# EAGLE board 6. prototipus - THT - Egyoldalas - FT232RL (EAGLE 7.2.0)
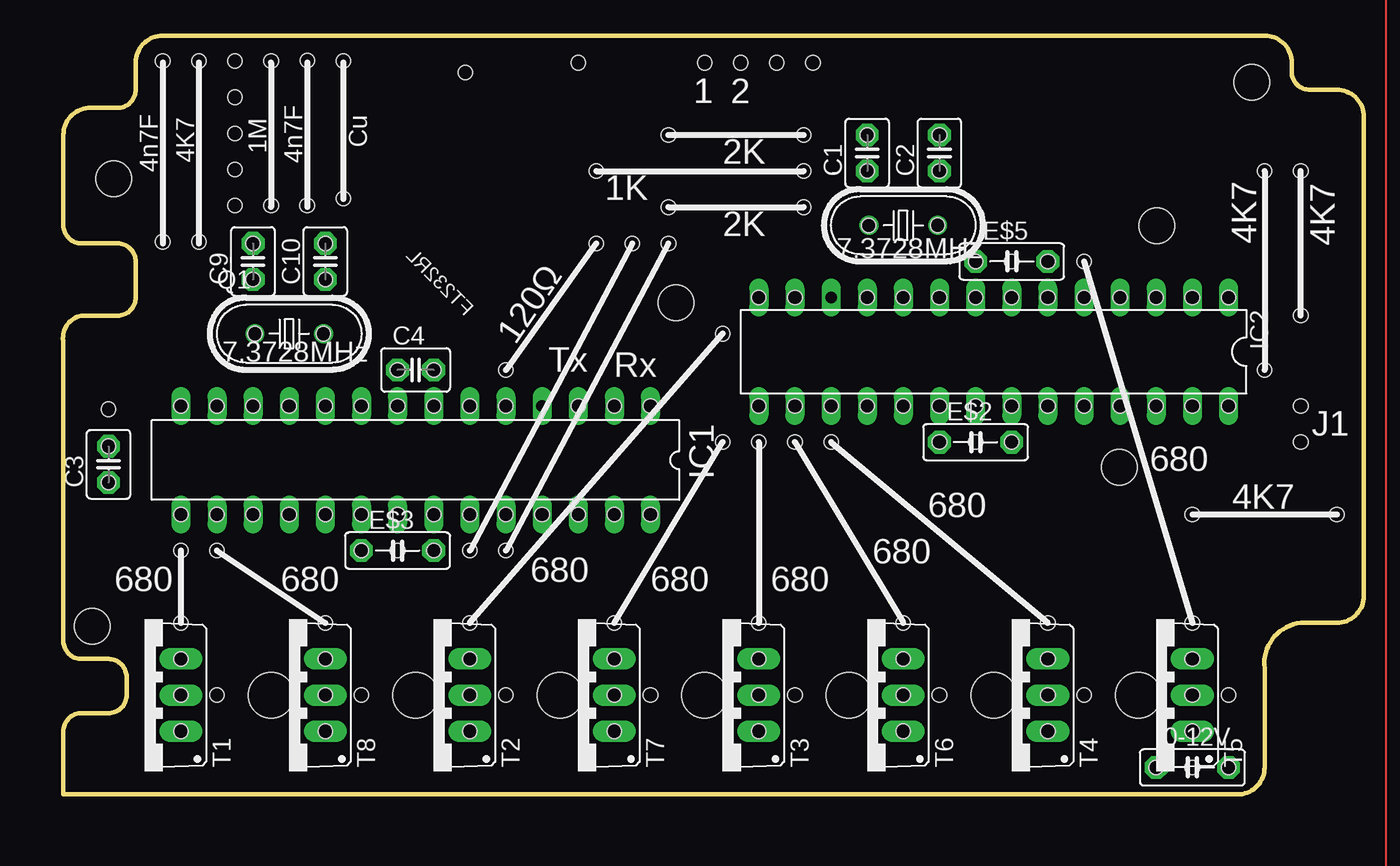
[diagram p0: board, top side]
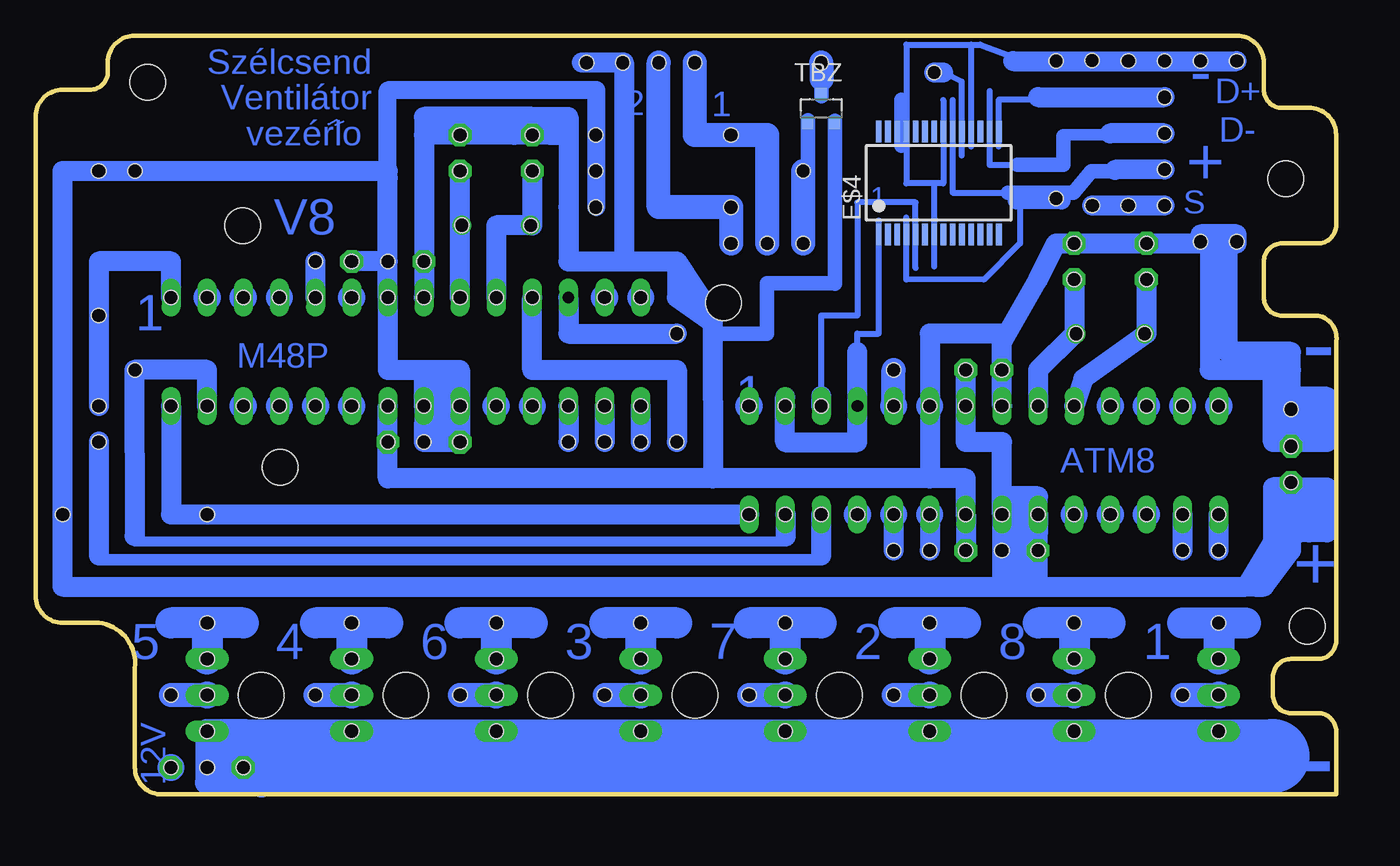
[diagram p1: board, bottom side, seen from below]

Size 91.47 x 53.34 mm. Coordinates in mm from the lower left corner, seen from the top.
Outline: 0.03,0 0.03,4.45 arc-90 1.3,5.71 3.21,5.71 arc90 4.48,6.98 4.48,8.25 arc90 3.21,9.53 1.3,9.53 arc-90 0.03,10.79 0.03,31.75 arc-90 1.3,33.66 3.84,33.66 arc90 5.11,34.92 5.11,37.46 arc90 3.84,38.73 1.3,38.73 arc-90 0.03,40.01 0.03,46.35 arc-90 1.94,48.26 3.84,48.26 arc90 5.11,49.53 5.11,51.44 arc-90 7.02,53.34 84.49,53.34 arc-90 86.39,51.44 86.39,50.8 arc90 87.66,49.53 89.57,49.53 arc-90 91.47,47.62 91.47,13.97 arc-90 89.57,12.07 87.03,12.07 arc90 84.49,8.89 84.49,1.9 arc-90 82.58,0 0.03,0
Copper layers (1*16): Top 0.035mm / dielectric 1.5mm / Bottom 0.035mm
Design rules "default": minimum track width 10mil, minimum drill 24mil, track to track 8mil, track to pad 8mil, pad to pad 8mil, via to via 8mil, smd to smd 8mil, copper to edge 40mil, drill to drill 8mil, minimum pad ring 10mil, minimum via ring 8mil, stop-mask expansion 4mil, vias tented up to drill 0mil, thermal gap 10mil
Holes 1 mm at 79.41,19.68 84.49,29.84 71.79,37.46 79.41,12.07 69.25,12.07 59.09,12.07 48.93,12.07 38.77,12.07 28.61,12.07 18.45,12.07 8.29,12.07 10.83,17.14 8.29,17.14 48.93,24.77 51.47,24.77 54.01,24.77 46.39,32.38 46.39,24.77 89.57,19.68 19.71,51.55 19.72,41.89 12.09,51.55 12.09,49.01 12.09,46.47 12.09,43.93 12.09,41.39 14.63,41.39 17.17,41.39 14.63,51.55 17.19,51.58 13.37,38.73 13.37,36.2 18.45,36.2 18.45,38.73 18.32,32.38 13.49,32.38 18.45,27.3 20.99,27.3 56.55,43.81 56.55,46.35 61.63,46.35 61.63,43.81 61.5,40.01 56.66,39.99 59.09,34.92 61.63,34.92 64.17,34.92 23.53,27.3 26.07,27.3 8.29,27.3 10.83,27.3 13.37,27.3 15.91,27.3 28.61,27.3 31.15,27.3 36.23,27.3 38.77,27.3 41.31,27.3 41.31,19.68 38.77,19.68 36.23,19.68 33.69,19.68 31.15,19.68 28.61,19.68 26.07,19.68 23.53,19.68 20.99,19.68 18.45,19.68 15.91,19.68 13.37,19.68 10.83,19.68 8.29,19.68 48.93,27.3 51.47,27.3 54.01,27.3 56.55,27.3 59.09,27.3 61.63,27.3 64.17,27.3 66.71,27.3 69.25,27.3 71.79,27.3 74.33,27.3 76.87,27.3 79.41,27.3 81.95,27.3 81.95,34.92 79.41,34.92 76.87,34.92 74.33,34.92 71.79,34.92 69.25,34.92 66.71,34.92 56.55,34.92 51.47,34.92 48.93,34.92 8.29,9.53 8.29,6.98 8.29,4.45 18.45,4.45 18.45,6.98 18.45,9.53 28.61,9.53 28.61,6.98 28.61,4.45 38.77,4.45 38.77,6.98 38.77,9.53 48.93,9.53 48.93,6.98 48.93,4.45 59.09,4.45 59.09,6.98 59.09,9.53 69.25,9.53 69.25,6.98 69.25,4.45 79.41,4.45 79.41,6.98 79.41,9.53 20.99,17.14 26.07,17.14 87.03,33.66 87.03,43.81 84.49,43.81 61.63,24.77 66.71,24.77 3.21,24.48 3.21,21.94 87.03,27.3 87.03,24.77 10.83,6.98 20.99,6.98 31.15,6.98 41.31,6.98 51.47,6.98 61.63,6.98 71.79,6.98 81.95,6.98 28.28,50.74 3.21,27.08 64.17,24.77 23.53,17.14 28.61,17.14 31.15,17.14 42.58,46.35 52.09,46.35 52.09,41.27 42.58,41.27 45.12,51.44 47.66,51.44 42.58,38.73 40.04,38.73 50.2,51.44 52.74,51.44 37.5,38.73 36.23,51.44 31.15,29.84 26.07,29.84 23.53,29.84 64.17,37.46 66.71,37.46 79.41,1.9 76.87,1.9 81.95,1.9 69.25,37.46 52.09,43.81 37.5,43.81 9.55,51.55 7.01,51.55 9.55,38.85 7.01,38.85
Holes 3.2 mm at 14.64,6.98 24.8,6.98 34.96,6.98 45.12,6.98 55.28,6.98 65.44,6.98 75.6,6.98
Holes 2.5 mm at 83.58,50.06 76.91,39.96 74.27,23.01 2.06,11.84 3.57,43.29 43.11,34.55

## Footprints (pad centres in the part's own frame; a part is rotated, then mirrored left to right if it is on the bottom)
C5B2.5 = drill 0.813 pad 1.6 octagon: 1 -2.54,0; 2 2.54,0
HC49U70 = drill 0.813: 1 -2.413,0; 2 2.413,0
C2.5-3 = drill 0.813 pad 1.6 octagon: 1 -1.27,0; 2 1.27,0
SSOP28 = smd 0.4 x 1.5: 1 -4.225,-3.625; 2 -3.575,-3.625; 3 -2.925,-3.625; 4 -2.275,-3.625; 5 -1.625,-3.625; 6 -0.975,-3.625; 7 -0.325,-3.625; 8 0.325,-3.625; 9 0.975,-3.625; 10 1.625,-3.625; 11 2.275,-3.625; 12 2.925,-3.625; 13 3.575,-3.625; 14 4.225,-3.625; 15 4.225,3.625; 16 3.575,3.625; 17 2.925,3.625; 18 2.275,3.625; 19 1.625,3.625; 20 0.975,3.625; 21 0.325,3.625; 22 -0.325,3.625; 23 -0.975,3.625; 24 -1.625,3.625; 25 -2.275,3.625; 26 -2.925,3.625; 27 -3.575,3.625; 28 -4.225,3.625
DIL28-3 = drill 0.813 long: 1 -16.51,-3.81; 2 -13.97,-3.81; 3 -11.43,-3.81; 4 -8.89,-3.81; 5 -6.35,-3.81; 6 -3.81,-3.81; 7 -1.27,-3.81; 8 1.27,-3.81; 9 3.81,-3.81; 10 6.35,-3.81; 11 8.89,-3.81; 12 11.43,-3.81; 13 13.97,-3.81; 14 16.51,-3.81; 15 16.51,3.81; 16 13.97,3.81; 17 11.43,3.81; 18 8.89,3.81; 19 6.35,3.81; 20 3.81,3.81; 21 1.27,3.81; 22 -1.27,3.81; 23 -3.81,3.81; 24 -6.35,3.81; 25 -8.89,3.81; 26 -11.43,3.81; 27 -13.97,3.81; 28 -16.51,3.81
TO220BV = drill 1.016 long: 1 -2.54,-2.54; 2 0,-2.54; 3 2.54,-2.54
SOT23 = smd 0.8 x 0.9: 1 -0.95,-1; 2 0.95,-1; 3 0,1

## Placement (x,y rotation side)
0-12V  [C5B2.5]  79.41,1.9 0 top
-  [HC49U70]  59.09,40.01 0 top
C1  [C2.5-3]  56.55,45.09 90 top
C2  [C2.5-3]  61.63,45.09 90 top
C3  [C2.5-3]  3.21,23.21 90 top
C4  [C2.5-3]  24.8,29.84 0 top
C9  [C2.5-3]  13.37,37.46 90 top
C10  [C2.5-3]  18.45,37.46 90 top
E$2  [C5B2.5]  64.17,24.77 0 top
E$3  [C5B2.5]  23.53,17.14 0 top
E$4  [SSOP28]  27.97,42.98 0 bottom
E$5  [C5B2.5]  66.71,37.46 0 top
IC1  MEGA8-P  [DIL28-3]  24.8,23.5 180 top
IC2  [DIL28-3]  65.44,31.12 180 top
Q1  [HC49U70]  15.91,32.38 0 top
T1  [TO220BV]  5.75,6.98 90 top
T2  [TO220BV]  26.07,6.98 90 top
T3  [TO220BV]  46.39,6.98 90 top
T4  [TO220BV]  66.71,6.98 90 top
T5  [TO220BV]  76.87,6.98 90 top
T6  [TO220BV]  56.55,6.98 90 top
T7  [TO220BV]  36.23,6.98 90 top
T8  [TO220BV]  15.91,6.98 90 top
TBZ  [SOT23]  36.23,48.22 0 bottom

## Library data of the parts
0-12V C1-C4 C9 C10 E$2 E$3 E$5 = capacitor-wima
- Q1 = crystal; OC_FARNELL: unknown; OC_NEWARK: unknown
E$4 = ftdichip
IC1 = atmel; OC_FARNELL: unknown; OC_NEWARK: unknown
IC2 = ic-package
T1-T8 = transistor-neu-to92
TBZ = on-semiconductor

## Nets
GND: C1.2 C2.2 C9.2 C10.2 IC1.8 IC1.22 IC2.8 IC2.22
N$1: IC1.20 IC1.21 IC2.7 IC2.20 IC2.21
S$2: C2.1 IC2.9
S$3: C1.1 IC2.10
S$5: C10.1 IC1.9
S$6: C9.1
S$8: IC1.15
S$9: IC1.16
S$10: T1.3
S$11: T8.3
S$12: T2.3
S$13: T7.3
S$14: T3.3
S$15: T6.3
S$16: T4.3
S$17: T5.3
S$19: IC2.11
S$20: IC2.12
S$21: IC2.15
S$22: IC2.16
S$23: IC2.17
S$24: IC2.5
S$26: IC1.23
S$28: IC1.28 IC2.28
S$33: T3.2
S$41: IC1.3
S$42: IC1.24
S$46: IC1.14
S$54: IC1.5
S$58: IC2.27
S$60: IC2.1
S$68: IC1.2

## Tracks (layer width: path | path; a pad name or v marks a point on that pad's centre or on a via)
GND
  Bottom 0.813: 54.01,46.35 54.04,45.05 | 54.01,41.27 54.04,41.92
  Bottom 1.016: 57.82,46.35 C2.2 64.17,46.35 | 19.72,38.73 C10.2 C9.2
  Bottom 1.27: 52.06,49.5 52.06,41.27
  Bottom 1.422: C1.2 57.82,46.35 | 57.82,46.35 64.17,46.35 | 64.17,46.35 IC2.8 | C1.2 56.55,47.62 | 56.55,47.62 57.82,47.62 | 57.82,47.62 57.82,46.35 | 57.82,47.62 64.17,47.62 64.17,46.35 | 55.28,46.35 C1.2 | 56.55,47.62 55.28,47.62 | 55.28,47.62 55.28,46.35 | IC2.22 66.71,22.23 43.85,22.23 | 28.61,22.23 26.07,22.23 IC1.22 26.07,17.14 | 28.61,22.23 43.85,22.23 | IC1.8 23.53,31.75 | 23.53,31.75 23.53,32.38 28.61,32.38 28.61,22.23 | 23.53,31.75 20.99,36.2 19.72,38.73 C9.2 8.92,38.73 | 8.92,38.73 8.92,29.84 4.48,29.84 | 4.48,24.77 4.48,29.84 | 3.21,29.84 4.48,29.84 | 3.21,29.84 3.21,31.12 7.65,31.12 7.65,38.73 | 7.65,38.73 8.92,38.73 | 3.21,25.4 3.21,29.84 | 55.28,47.62 54.01,47.62 54.01,46.35 | 55.28,46.35 54.01,46.35 | 54.01,46.35 54.01,41.27 54.01,37.46 46.39,37.46 | 46.39,37.46 46.39,34.92 43.86,33.17 43.85,22.23 | 43.85,33.66 46.39,37.46 | 50.11,51.45 50.11,38.02 | 7.65,38.73 7.02,38.73 7.02,39.37 9.56,39.37
N$1
  Bottom 1.27: 66.71,43.81 66.71,49.48
  Bottom 1.422: 64.17,29.84 66.71,29.84 IC2.7 66.71,37.46 | 62.9,29.84 61.63,29.84 IC2.20 | IC2.21 62.9,27.3 | 62.9,27.3 IC2.20 | 66.71,37.46 66.71,43.31 66.71,43.81 89.57,43.81 89.57,14.61 23.53,14.61 | IC2.21 64.17,29.84 | 64.17,29.84 62.9,29.84 | 62.9,29.84 62.9,27.3 | IC2.20 IC2.21 | IC2.21 64.17,26.04 | 64.17,26.04 61.63,26.04 IC2.20 | IC2.20 61.63,24.77 64.17,24.77 64.17,26.04 | 23.53,20.95 23.53,24.77 26.07,24.77 26.07,29.84 | 23.53,20.95 20.99,20.95 IC1.20 | IC1.21 23.53,20.95 | IC1.21 23.53,18.41 | IC1.20 IC1.21 | IC1.20 20.99,18.41 | 20.99,18.41 22.26,18.41 | 22.26,18.41 23.53,18.41 | 20.99,14.61 20.99,18.41 | 20.99,14.61 6.38,14.61 | 22.26,14.61 20.99,14.61 | 6.38,14.61 3.21,17.78 | 3.21,17.78 3.21,21.59 | 3.21,21.59 4.48,21.59 4.48,17.78 6.38,14.61 | 3.21,17.78 3.21,17.14 | 3.21,17.14 5.75,14.61 | 5.75,14.61 6.38,14.61 | 5.75,14.61 5.11,14.61 3.21,17.14 | 23.53,18.41 23.53,14.61 | 23.53,14.61 22.26,14.61 | 22.26,14.61 22.26,18.41 | 1.94,18.41 0.67,18.41 0.67,21.59 3.21,21.59 | 1.94,18.41 1.94,20.95 | 1.94,18.41 2.57,18.41 | 66.71,37.46 69.25,37.46
S$1
  Bottom 0.7: 38.77,17.78 84.49,17.78
S$2
  Bottom 1.422: IC2.9 C2.1
S$3
  Bottom 1.422: C1.1 56.55,40.01 59.09,40.01 IC2.10
S$4
  Bottom 0.813: 36.23,16.51 87.03,16.51
S$5
  Bottom 1.422: C10.1 18.45,32.38 20.99,29.84 IC1.9
S$6
  Bottom 0.305: 13.37,32.38 14,32.38
  Bottom 1.422: C9.1 13.37,32.38 17.81,29.21 18.45,27.3
S$7
  Bottom 2.184: 10.83,12.07 6.38,12.07
S$8
  Bottom 1.422: 8.29,17.14 IC1.15
S$9
  Bottom 1.422: IC1.16 10.83,17.14
S$10
  Bottom 2.184: 8.29,12.07 T1.3
S$11
  Bottom 2.184: 18.45,12.07 T8.3
S$12
  Bottom 2.184: 28.61,12.07 T2.3
S$13
  Bottom 2.184: 38.77,12.07 T7.3
S$14
  Bottom 2.184: 48.93,12.07 T3.3
S$15
  Bottom 2.184: 59.09,12.07 T6.3
S$16
  Bottom 2.184: 69.25,12.07 T4.3
S$17
  Bottom 2.184: 79.41,12.07 T5.3
S$18
  Bottom 5.2: 76.89,2.7 4.5,2.7
S$19
  Bottom 1.422: 46.39,24.77 46.39,29.84 56.55,29.84 IC2.11
S$20
  Bottom 1.422: IC2.12 54.01,32.38 46.39,32.38
S$21
  Bottom 1.422: IC2.15 48.93,24.77
S$22
  Bottom 1.422: IC2.16 51.47,24.77
S$23
  Bottom 1.422: IC2.17 54.01,24.77
S$24
  Bottom 1.422: IC2.5 71.79,37.46
S$25
  Bottom 2.184: 15.91,12.07 20.99,12.07 | 26.07,12.07 31.15,12.07 | 36.23,12.07 41.31,12.07 | 46.39,12.07 51.47,12.07 | 56.55,12.07 61.63,12.07 | 66.71,12.07 71.79,12.07 | 76.87,12.07 81.95,12.07
S$26
  Bottom 1.422: IC1.23 28.61,17.14
S$27
  Bottom 1.422: 1.94,27.94 2.57,27.94 | 1.94,27.94 1.94,24.77 | 1.94,27.94 0.67,27.94 0.67,24.77 4.48,24.77
S$28
  Bottom 1.422: IC2.28 81.95,19.68 IC1.28
S$29
  Bottom 1.422: 22.73,51.54 7.01,51.55
S$30
  Bottom 0.406: 25.7,52.7 25.7,45.55
S$31
  Bottom 1.422: 20.98,49.01 12.09,49.01
S$32
  Bottom 0.406: 27.65,48.8 27.65,42.95 28.3,42.95 | 28.3,42.95 28.3,37.09 | 21.74,51.45 25.05,52.7 30.25,52.7 30.25,42.95 28.3,42.95
S$33
  Bottom 1.676: T3.2 51.47,6.98 | 59.09,6.98 61.63,6.98 | 69.25,6.98 71.79,6.98 | 79.41,6.98 81.95,6.98 | 38.77,6.98 41.31,6.98 | 28.61,6.98 31.15,6.98 | 18.45,6.98 20.99,6.98 | 8.29,6.98 10.83,6.98
S$34
  Bottom 0.813: 19.13,46.35 15.91,46.35
S$35
  Bottom 1.422: 12.09,43.93 15.59,43.91
S$36
  Bottom 1.422: 12.09,46.47 15.92,46.47 15.92,46.45
S$37
  Bottom 1.422: 12.09,41.39 17.17,41.39
S$38
  Bottom 0.406: 29.61,41.62 33.69,41.62 33.69,33.66 36.23,33.66 36.22,28
S$39
  Bottom 0.406: 32.2,40.34 32.21,32.41
S$40
  Bottom 0.406: 26.35,44.9 26.35,50.09 27.65,50.74
  Bottom 1.422: 28.3,50.74 27.65,50.74
S$41
  Bottom 1.422: IC1.3 36.23,28
S$42
  Bottom 1.422: IC1.24 31.15,17.14
S$43
  Bottom 0.406: 23.75,45.55 23.73,48.85 21.13,48.85
S$44
  Bottom 1.676: 45.12,51.44 45.12,46.35 40.04,46.35 40.04,38.73
S$45
  Bottom 1.676: 47.66,51.44 47.66,41.27 42.58,41.27 42.58,38.73
S$48
  Bottom 1.676: 36.23,51.44 36.22,50.29
S$49
  Bottom 0.406: 27,48.8 27,42.3 23.1,42.3
  Bottom 1.016: 23.1,42.3 18.52,42.3 17.25,43.81 15.16,43.81
S$50
  Bottom 1.016: 37.17,47.37 37.17,43.56 | 35.27,47.34 35.27,35.91 | 36.22,50.35 36.22,49.08
S$51
  Bottom 0.406: 24.4,49.45 24.4,44.24 22.45,44.24
  Bottom 1.016: 22.45,44.24 19.2,44.24 19.2,46.26
S$52
  Bottom 1.676: 37.5,38.73 37.5,43.81
S$53
  Bottom 1.016: 35.27,35.92 40.04,35.92 40.04,32.38 43.85,32.38
S$54
  Bottom 1.676: IC1.5 31.15,29.84
S$55
  Bottom 1.27: 19.31,41.75 22.5,41.76
S$56
  Bottom 1.422: 38.77,19.68 38.74,19.68 38.74,18.13
S$57
  Bottom 1.422: 36.23,19.69 36.24,19.69 36.24,16.8
S$58
  Bottom 1.422: 84.49,29.84 79.41,29.84 IC2.27
S$59
  Bottom 1.422: 84.49,29.85 84.52,29.85 84.51,18.15
S$60
  Bottom 1.422: IC2.1 81.95,37.46 87.03,37.46 87.03,27.3
S$61
  Bottom 1.422: 87.02,24.81 87.02,16.81
S$62
  Bottom 0.406: 29.6,36.99 29.6,41.62 | 30.24,36.2 30.24,40.56
S$63
  Bottom 0.406: 32.2,39.7 32.2,39.05
S$64
  Bottom 0.406: 22.26,41.27 22.26,38.73 24.8,36.2 30.25,36.21
S$65
  Bottom 1.676: 76.87,4.45 79.42,4.46 79.42,0.83 75.6,0.82 75.6,0.63
S$68
  Bottom 0.406: 33.69,31.12 33.69,32.38 32.2,32.38
  Bottom 1.422: 33.69,31.12 33.69,24.77 38.77,24.77 IC1.2 38.77,27.94
S$69
  Bottom 0.15: 70.38,47.06 69.83,47.32 | 70.88,47.11 70.3,47.41
S$70
  Bottom 1.016: 30.6,48.84 30.6,45.59
S$71
  Bottom 1.27: 52.15,49.48 66.71,49.48
  Bottom 1.422: 50.2,51.44 53.06,51.44
(copper drawn outside any net)
  shapes: Bottom circle x34, Top area x1

## Text on the board
Bottom: - | D+ | 1 | 2 | D- | Szélcsend / Ventilátor / vezérlo | + | 1 | S | V8 | 1 | - | M48P | 1 | ATM8 | + | 1 | 8 | 2 | 7 | 3 | 6 | 4 | 5 | 12V | -
tPlace: 4n7F | 1 | 2 | 4n7F | 1M | Cu | 4K7 | 2K | 1K | 2K | 4K7 | 4K7 | 7.3728MHz | FT232RL | 120Ω | 7.3728MHz | Tx | Rx | J1 | 680 | 4K7 | 680 | 680 | 680 | 680 | 680 | 680 | 680